# Altium PCB RheoBoard_V8.PcbDoc (part 3 of 3)
Units mm, origin at the board's own origin, x right, y up, seen from the top; angles counter-clockwise.
Board outline 57.53 x 83.82 mm, 2 copper layers (Top Layer, Bottom Layer); 104 components, 45 nets, 269 pads, 428 vias.
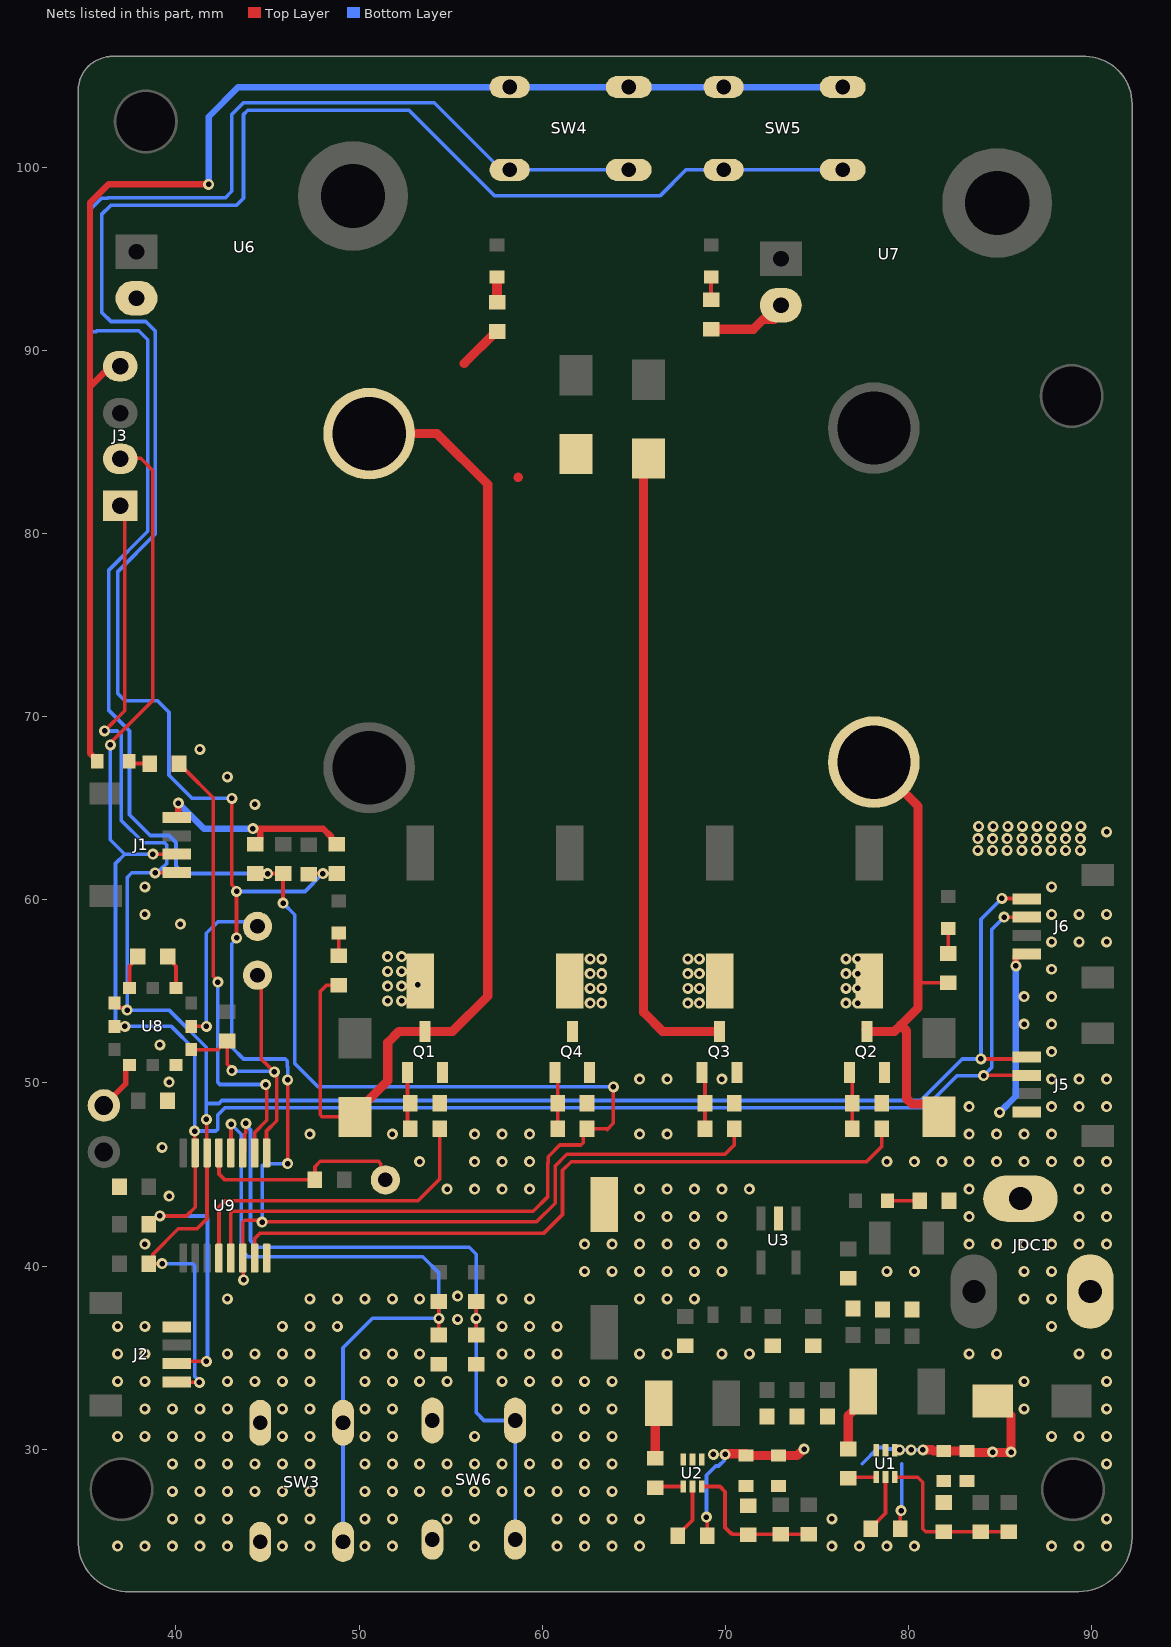
[diagram p2: the nets of this part, all layers, seen from the top]

## Via types
v1: diameter 0.6, hole 0.3, Top Layer to Bottom Layer, tented both sides, 428 vias

## Nets (pads, with @x,y where several pads share a name; then routed paths per layer and width w, separated by ;. In a path a pad name is that pad's centre, name@x,y a point inside that pad or via, vN(x,y) a via of type N, cw(c..) or ccw(c..) an arc to the next point about the centre after c; other vN are vias at no path point) (continued)
GND: C2.1 C3.1 C4.1 C5.1 C6.1 C8.1 C9.1 C10.1 C11.1 C12.1 C13.1 C14.1 C15.2 C16.1 C17.1 C18.1 C19.1 C20.2 C21.2 C22.2 C23.2 C26.1 C29.1 C32.1 C33.1 D6.2 J1.1 J2.1 J3.4 J5.1 J6.1 JDC1.2 JDC1.3 Q1.2 Q2.2 Q3.2 Q4.2 R3.1 R7.1 R8.2 R14.1 R20.1 R23.1 R24.1 SW3.3 SW3.4 SW4.3 SW4.4 SW5.3 SW5.4 SW6.3 SW6.4 U1.3 U2.3 U3.2 U8.10 U9.8 | length 99.7
  Top Layer w0.35: D6.2@35.701,67.564 35.701,67.614 35.526,67.789 35.511,67.789 35.306,67.994 35.306,88.011 ; J3.4@36.957,89.129 36.424,89.129 35.306,88.011 ; J1.1@40.042,64.492 40.132,64.582 v1(40.132,65.278) ; v1(41.783,99.06) 36.322,99.06 35.306,98.044 35.306,88.011 ; v1(44.196,63.881) 44.655,63.881 ; C26.1@44.323,63.03 44.373,63.03 44.598,63.255 44.598,63.824 44.655,63.881 ; C29.1@48.768,63.03 48.718,63.03 48.493,63.255 48.493,63.422 48.034,63.881 44.655,63.881 ; v1(85.852,56.388) 85.85,56.39 85.85,56.922 85.975,57.047 J6.1@86.45,57.047
  Bottom Layer w0.35: v1(40.132,65.278) 41.529,63.881 v1(44.196,63.881) ; v1(41.783,99.06) 41.783,102.743 43.409,104.369 SW4.4@58.217,104.369 SW4.3@64.719,104.369 SW5.4@69.901,104.369 SW5.3@76.403,104.369 ; v1(84.963,48.387) 85.852,49.276 85.852,54.705 v1(85.852,56.388)
  other v1: 36.809,24.705 38.309,24.705 39.809,24.705 41.309,24.705 42.809,24.705 45.809,24.705 47.309,24.705 50.309,24.705 51.809,24.705 56.309,24.705 60.809,24.705 62.309,24.705 63.809,24.705 65.309,24.705 75.809,24.705 77.309,24.705 78.809,24.705 80.309,24.705 87.809,24.705 89.309,24.705 90.809,24.705 39.809,26.205 41.309,26.205 42.809,26.205 45.809,26.205 47.309,26.205 50.309,26.205 51.809,26.205 54.809,26.205 56.309,26.205 60.809,26.205 62.309,26.205 63.809,26.205 65.309,26.205 75.809,26.205 90.809,26.205 39.809,27.705 41.309,27.705 42.809,27.705 44.309,27.705 45.809,27.705 47.309,27.705 50.309,27.705 51.809,27.705 53.309,27.705 54.809,27.705 56.309,27.705 57.809,27.705 59.309,27.705 60.809,27.705 62.309,27.705 63.809,27.705 39.809,29.205 41.309,29.205 42.809,29.205 44.309,29.205 45.809,29.205 47.309,29.205 50.309,29.205 51.809,29.205 53.309,29.205 54.809,29.205 56.309,29.205 57.809,29.205 59.309,29.205 60.809,29.205 62.309,29.205 63.809,29.205 90.809,29.205 36.809,30.705 38.309,30.705 39.809,30.705 41.309,30.705 42.809,30.705 45.809,30.705 47.309,30.705 50.309,30.705 51.809,30.705 56.309,30.705 60.809,30.705 62.309,30.705 63.809,30.705 87.809,30.705 89.309,30.705 90.809,30.705 38.309,32.205 39.809,32.205 41.309,32.205 42.809,32.205 45.809,32.205 47.309,32.205 50.309,32.205 51.809,32.205 60.809,32.205 62.309,32.205 63.809,32.205 86.309,32.205 90.809,32.205 36.809,33.705 38.309,33.705 42.809,33.705 44.309,33.705 45.809,33.705 47.309,33.705 50.309,33.705 51.809,33.705 53.309,33.705 54.809,33.705 57.809,33.705 59.309,33.705 60.809,33.705 62.309,33.705 63.809,33.705 86.309,33.705 90.809,33.705 36.809,35.205 38.309,35.205 42.809,35.205 44.309,35.205 45.809,35.205 47.309,35.205 50.309,35.205 51.809,35.205 53.309,35.205 57.809,35.205 59.309,35.205 60.809,35.205 65.309,35.205 66.809,35.205 69.809,35.205 71.309,35.205 83.309,35.205 84.809,35.205 89.309,35.205 90.809,35.205 36.809,36.705 38.309,36.705 45.809,36.705 47.309,36.705 48.809,36.705 57.809,36.705 59.309,36.705 60.809,36.705 87.809,36.705 55.372,37.084 42.809,38.205 47.309,38.205 48.809,38.205 50.309,38.205 51.809,38.205 53.309,38.205 57.809,38.205 59.309,38.205 65.309,38.205 66.809,38.205 68.309,38.205 86.309,38.205 87.809,38.205 55.372,38.354 62.309,39.705 63.809,39.705 65.309,39.705 66.809,39.705 68.309,39.705 69.809,39.705 78.809,39.705 80.309,39.705 86.309,39.705 87.809,39.705 38.309,41.205 62.309,41.205 63.809,41.205 65.309,41.205 66.809,41.205 68.309,41.205 69.809,41.205 83.309,41.205 84.809,41.205 86.309,41.205 87.809,41.205 89.309,41.205 90.809,41.205 65.309,42.705 66.809,42.705 68.309,42.705 69.809,42.705 83.309,42.705 89.309,42.705 90.809,42.705 39.624,43.815 54.809,44.205 56.309,44.205 57.809,44.205 59.309,44.205 65.309,44.205 66.809,44.205 68.309,44.205 69.809,44.205 71.309,44.205 83.309,44.205 89.309,44.205 90.809,44.205 53.309,45.705 56.309,45.705 57.809,45.705 59.309,45.705 78.809,45.705 80.309,45.705 81.809,45.705 83.309,45.705 84.809,45.705 86.309,45.705 87.809,45.705 89.309,45.705 90.809,45.705 39.243,46.482 47.309,47.205 51.809,47.205 56.309,47.205 57.809,47.205 59.309,47.205 65.309,47.205 66.809,47.205 83.309,47.205 84.809,47.205 86.309,47.205 87.809,47.205 83.309,48.705 87.809,48.705 89.309,48.705 90.809,48.705 39.624,50.038 65.309,50.205 66.809,50.205 69.809,50.205 87.809,50.205 89.309,50.205 90.809,50.205 87.809,51.705 39.116,52.07 86.309,53.205 87.809,53.205 62.611,54.356 63.246,54.356 67.945,54.356 68.58,54.356 76.581,54.356 77.216,54.356 51.562,54.483 52.324,54.483 86.309,54.705 87.809,54.705 62.611,55.16 63.246,55.16 67.945,55.16 68.58,55.16 76.581,55.16 77.216,55.16 51.562,55.287 52.324,55.287 53.213,55.372 62.611,55.965 63.246,55.965 67.945,55.965 68.58,55.965 76.581,55.965 77.216,55.965 51.562,56.092 52.324,56.092 87.809,56.205 62.611,56.769 63.246,56.769 67.945,56.769 68.58,56.769 76.581,56.769 77.216,56.769 51.562,56.896 52.324,56.896 87.809,57.705 89.309,57.705 90.809,57.705 40.244,58.674 38.309,59.205 87.809,59.205 89.309,59.205 90.809,59.205 38.309,60.705 87.809,60.705 83.784,62.697 84.582,62.697 85.38,62.697 86.179,62.697 86.977,62.697 87.775,62.697 88.573,62.697 89.372,62.697 83.784,63.332 84.582,63.332 85.38,63.332 86.179,63.332 86.977,63.332 87.775,63.332 88.573,63.332 89.372,63.332 90.809,63.705 83.82,64.008 84.618,64.008 85.417,64.008 86.215,64.008 87.013,64.008 87.811,64.008 88.61,64.008 89.408,64.008 44.309,65.205 42.809,66.705 41.309,68.205
LED: R6.1 U9.10 | length 25
  Top Layer w0.2: R6.1@40.17,67.437 40.17,67.387 40.47,67.087 40.52,67.087 42.037,65.57 42.037,55.816 42.291,55.562 v1(42.291,55.499) ; U9.10@44.297,46.177 44.297,47.294 44.958,47.955 44.958,49.853 v1(44.901,49.91)
  Bottom Layer w0.2: v1(42.291,55.499) 42.291,50.028 42.408,49.911 v1@44.9,49.911
NetC1_1: C1.1 L1.1 U1.2 | length 3.5
  Top Layer w0.5: C1.1@76.708,30.01 76.708,31.83 77.525,32.647 L1.1@77.525,33.147
NetC1_2: C1.2 U1.4 | length 1.9
  Top Layer w0.2: C1.2@76.462,28.164 C1.2@76.708,28.41 76.773,28.475 U1.4@78.24,28.475
NetC7_1: C7.1 L2.1 U2.2 | length 3.1
  Top Layer w0.5: C7.1@66.167,29.502 66.167,32.33 L2.1@66.349,32.512
NetC7_2: C7.2 U2.4 | length 1.6
  Top Layer w0.2: C7.2@66.167,27.902 66.232,27.967 U2.4@67.699,27.967
NetC24_1: C24.1 R1.1 R7.2 U1.6 | length 9
  Top Layer w0.2: U1.6@79.24,28.475 80.491,28.475 80.772,28.194 80.772,25.654 80.937,25.489 R7.2@81.915,25.489 R1.1@83.947,25.489 C24.1@85.471,25.489
NetC25_1: C25.1 R2.1 R3.2 U2.6 | length 8.1
  Top Layer w0.2: U2.6@68.699,27.967 69.696,27.967 69.977,27.686 69.977,25.728 70.305,25.4 70.358,25.4 70.396,25.362 R2.1@73.025,25.362 C25.1@74.549,25.362
NetC26_2: C26.2 R18.1 R22.1 SW4.1 SW4.2 U9.5 | length 141
  Top Layer w0.2: U9.5@42.997,40.437 42.997,42.88 43.114,42.997 59.507,42.997 60.306,43.796 60.306,45.632 60.325,45.651 60.325,45.974 60.96,46.609 62.103,46.609 62.23,46.736 62.23,47.291 R22.1@62.437,47.498 63.5,47.498 63.544,47.454 63.881,47.791 v1(63.881,49.784) ; v1(45.008,61.43) R18.1@45.847,61.43 v1(45.847,59.817)
  Bottom Layer w0.2: v1(45.008,61.43) 40.424,61.43 40.005,61.849 40.005,63.119 39.617,63.507 38.601,63.507 37.465,64.643 37.465,69.215 36.322,70.358 36.322,77.978 38.462,80.118 38.462,90.57 37.973,91.059 35.687,91.059 35.643,91.015 35.477,91.015 35.306,91.186 35.306,97.663 35.941,98.298 36.264,98.298 36.283,98.317 42.691,98.317 43.053,98.679 43.053,102.87 43.688,103.505 54.102,103.505 57.76,99.847 SW4.2@58.217,99.847 SW4.1@64.719,99.847 ; v1(45.847,59.817) 46.482,59.182 46.482,51.054 47.752,49.784 v1(63.881,49.784)
NetC29_2: C29.2 R19.1 R21.1 SW5.1 SW5.2 U9.6 | length 155
  Top Layer w0.2: v1(43.053,65.532) 43.053,60.814 43.307,60.56 v1(43.307,60.452) v1(43.307,57.912) ; v1(43.688,39.243) 43.667,39.264 43.667,40.417 U9.6@43.647,40.437 43.647,42.387 43.764,42.504 44.387,42.504 44.396,42.495 v1@44.695,42.495 ; v1(44.704,42.397) 44.725,42.418 59.69,42.418 60.706,43.434 60.706,45.466 61.341,46.101 69.977,46.101 70.481,46.605 R21.1@70.481,47.498 ; v1(46.101,45.593) v1(46.101,50.165) ; R19.1@47.244,61.4 47.274,61.43 v1(48.021,61.43)
  Bottom Layer w0.2: v1(43.053,65.532) 40.894,65.532 39.624,66.802 39.624,70.231 38.989,70.866 37.211,70.866 36.83,71.247 36.83,77.92 38.862,79.952 38.862,91.059 38.354,91.567 36.449,91.567 35.941,92.075 35.941,97.409 36.449,97.917 43.307,97.917 43.688,98.298 43.688,102.87 43.923,103.105 52.724,103.105 57.404,98.425 66.421,98.425 67.843,99.847 SW5.2@69.901,99.847 SW5.1@76.403,99.847 ; v1(43.307,57.912) 43.307,57.849 43.053,57.595 43.053,51.943 43.688,51.308 45.965,51.308 46.082,51.191 46.082,50.888 46.101,50.869 v1(46.101,50.165) ; v1(43.307,60.452) 47.043,60.452 v1(48.021,61.43) ; v1(44.704,42.397) 44.704,45.476 44.821,45.593 v1(46.101,45.593)
NetC30_1: C30.1 U8.6 | length 1.9
  Top Layer w0.2: C30.1@39.535,56.896 39.535,56.846 40.005,56.376 U8.6@40.005,55.186
NetC30_2: C30.2 U8.4 | length 1.9
  Top Layer w0.2: U8.4@37.465,55.186 37.465,56.376 37.935,56.846 C30.2@37.935,56.896
NetD1_2: D1.2 R8.1 | length 1.8
  Top Layer w0.2: D1.2@78.855,43.561 R8.1@80.607,43.561
NetD2_1: D2.1 Q1.3 R9.1 U4.2 | length 57.7
  Top Layer w0.2: R9.1@48.895,55.334 48.222,55.334 47.879,54.991 47.879,48.261 47.996,48.144 D2.1@49.784,48.144
  Top Layer w0.5: U4.2@49.53,85.447 54.253,85.447 57.023,82.677 57.023,54.737 55.1,52.814 Q1.3@53.594,52.814 52.179,52.814 51.562,52.197 51.562,50.122 49.784,48.344 D2.1@49.784,48.144
NetD3_1: D3.1 Q2.3 R12.1 U5.2 | length 25.9
  Top Layer w0.2: 80.518,55.372 80.607,55.461 R12.1@82.169,55.461
  Top Layer w0.5: Q2.3@77.674,52.959 77.674,52.914 77.774,52.814 79.23,52.814 79.566,53.149 ; U5.2@78.105,67.512 80.518,65.099 80.518,55.372 80.518,54.102 79.566,53.149 ; D3.1@81.661,48.155 81.661,48.206 81.011,48.856 80.176,48.856 79.883,49.149 79.883,52.832 79.566,53.149
NetD4_1: D4.1 Q4.3 R15.1 U6.2 | length 2.5
  Top Layer w0.5: 55.741,89.281 57.481,91.021 R15.1@57.531,91.021 ; 58.674,83.058 58.685,83.069
NetD5_1: D5.1 Q3.3 R16.1 U7.2 | length 37.5
  Top Layer w0.5: D5.1@65.532,83.069 65.532,53.848 66.566,52.814 Q3.3@69.681,52.814 ; R16.1@69.215,91.148 71.527,91.148 72.073,91.694 U7.2@72.644,91.694
NetD6_1: D6.1 R6.2 | length 1.2
  Top Layer w0.2: D6.1@37.451,67.564 37.578,67.437 R6.2@38.57,67.437
NetD7_2: D7.2 R9.2 | length 1.2
  Top Layer w0.2: R9.2@48.895,56.934 D7.2@48.895,58.18
NetD8_2: D8.2 R12.2 | length 1.4
  Top Layer w0.2: R12.2@82.169,57.061 D8.2@82.169,58.434
NetD9_2: D9.2 R15.2 | length 1.4
  Top Layer w0.53: R15.2@57.531,92.621 D9.2@57.531,93.994
NetD10_2: D10.2 R16.2 | length 1.2
  Top Layer w0.2: R16.2@69.215,92.748 D10.2@69.215,93.994
NetJP1_1: JP1.1 U8.12 | length 2.8
  Top Layer w0.3: JP1.1@36.068,48.768 37.266,49.966 37.266,50.811 37.441,50.986 U8.12@37.465,50.986
NetQ1_1: Q1.1 R10.2 R14.2 | length 3.1
  Top Layer w0.2: Q1.1@52.644,50.564 52.644,47.648 R10.2@52.794,47.498
NetQ2_1: Q2.1 R11.2 R20.2 | length 3.1
  Top Layer w0.2: Q2.1@76.774,50.564 76.924,50.414 R20.2@76.924,48.895 R11.2@76.924,47.498
NetQ3_1: Q3.1 R21.2 R23.2 | length 3.1
  Top Layer w0.2: Q3.1@68.731,50.564 68.881,50.414 R23.2@68.881,48.895 R21.2@68.881,47.498
NetQ4_1: Q4.1 R22.2 R24.2 | length 3.1
  Top Layer w0.2: Q4.1@60.687,50.564 60.837,50.414 R24.2@60.837,48.895 R22.2@60.837,47.498
NetR10_1: R10.1 U9.4 | length 18.2
  Top Layer w0.2: U9.4@42.347,40.437 42.347,43.236 42.672,43.561 53.213,43.561 54.394,44.742 R10.1@54.394,47.498
NetR11_1: R11.1 U9.7 | length 39.8
  Top Layer w0.2: U9.7@44.297,40.437 44.297,41.503 44.577,41.783 60.071,41.783 61.106,42.818 61.106,45.231 61.576,45.701 77.705,45.701 78.524,46.52 R11.1@78.524,47.498
NetR13_2: R13.2 TP1.1 U9.13 | length 12
  Top Layer w0.2: U9.13@42.347,46.177 42.347,45.029 42.672,44.704 R13.2@47.587,44.704 47.587,45.428 47.879,45.72 51.054,45.72 51.181,45.593 51.181,44.958 TP1.1@51.435,44.704
NetR25_1: R25.1 U1.5 | length 3.2
  Top Layer w0.2: R25.1@77.94,25.654 77.94,25.704 78.74,26.504 U1.5@78.74,28.475
NetR26_1: R26.1 U2.5 | length 3
  Top Layer w0.2: R26.1@67.399,25.273 67.399,25.323 68.199,26.123 U2.5@68.199,27.967
NetTP3_1: TP3.1 U8.8 | length 9.1
  Top Layer w0.2: U8.8@40.835,53.086 v1(41.656,53.086)
  Bottom Layer w0.2: v1(41.656,53.086) 41.656,58.166 42.291,58.801 44.196,58.801 TP3.1@44.45,58.547
RES: R17.2 TP2.1 U8.9 U9.9 | length 16.6
  Top Layer w0.2: U8.9@40.835,51.816 42.279,51.816 42.749,52.286 R17.2@42.799,52.286 42.799,51.035 43.053,50.781 v1(43.053,50.673) ; TP2.1@44.45,55.88 44.649,55.681 44.649,51.318 v1(45.37,50.597) 45.37,50.489 45.501,50.357 45.501,47.932 44.947,47.378 U9.9@44.947,46.177
  Bottom Layer w0.2: v1(43.053,50.673) 43.091,50.635 45.332,50.635 v1(45.37,50.597)
SCL: J1.4 J2.4 J3.1 J5.4 J6.4 R28.2 U8.3 U9.14 | length 120
  Top Layer w0.2: v1(36.103,69.215) 37.211,70.323 37.211,81.255 J3.1@36.957,81.509 ; U8.3@36.635,54.356 36.635,54.331 36.86,54.106 37.207,54.106 v1(37.338,53.975) ; v1(38.862,61.468) 40.018,61.468 J1.4@40.042,61.492 ; v1(39.243,40.132) R28.2@38.519,40.132 38.744,40.357 38.744,40.649 40.132,42.037 41.148,42.037 41.697,42.586 U9.14@41.697,46.177 41.677,46.197 41.677,47.985 v1(41.656,48.006) ; J2.4@40.042,33.679 40.066,33.655 v1(41.275,33.655) ; v1(83.947,51.308) 86.347,51.308 J5.4@86.45,51.411 ; v1(85.09,60.071) 86.426,60.071 J6.4@86.45,60.047
  Bottom Layer w0.2: v1(36.103,69.215) 36.79,69.215 37.015,68.99 37.015,64.33 38.237,63.107 39.38,63.107 39.497,62.99 39.497,61.976 39.279,61.758 39.26,61.758 38.97,61.468 37.592,61.468 37.338,61.214 v1(37.338,53.975) 39.624,53.975 41.656,51.943 41.656,48.879 ; v1(39.243,40.132) 40.904,40.132 41.021,40.015 41.021,33.972 41.275,33.718 v1(41.275,33.655) ; v1(41.656,48.006) 41.656,48.879 ; v1(85.09,60.071) 83.947,58.928 v1(83.947,51.308) 82.931,51.308 80.664,49.041 42.506,49.041 42.344,48.879 41.656,48.879
SDA: J1.3 J2.3 J3.2 J5.3 J6.3 R27.2 U8.2 U9.15 | length 121.8
  Top Layer w0.2: v1(36.415,68.453) 36.415,68.561 38.735,70.881 38.735,83.439 38.075,84.099 J3.2@36.957,84.099 ; v1(38.735,62.484) 40.034,62.484 J1.3@40.042,62.492 ; v1(39.116,42.735) 40.576,42.735 41.047,43.206 U9.15@41.047,46.177 41.034,46.19 41.034,47.358 v1(41.021,47.371) ; J2.3@40.234,34.671 40.361,34.798 v1(41.656,34.798) ; v1(84.095,50.399) v1(84.095,50.399) 84.082,50.411 J5.3@86.45,50.411 ; v1(85.217,59.055) 85.225,59.047 J6.3@86.45,59.047
  Bottom Layer w0.2: v1(36.415,68.453) 36.415,63.28 37.211,62.484 ; v1(38.735,62.484) 37.211,62.484 ; v1(39.116,42.735) 41.602,42.735 41.719,42.618 41.719,34.861 v1(41.656,34.798) ; v1(85.217,59.055) 84.547,58.385 84.547,50.851 v1(84.095,50.399) 82.657,50.399 80.899,48.641 42.672,48.641 42.291,48.26 42.291,47.488 42.174,47.371 v1(41.021,47.371) 41.021,51.816 39.751,53.086 v1(37.211,53.086) 36.83,53.086 36.703,53.213 36.703,61.976 37.211,62.484
SW1: C9.2 R4.1 SW3.1 SW3.2 U9.12 | length 40.8
  Top Layer w0.2: U9.12@42.997,46.177 43.007,46.187 43.007,47.737 v1(43.016,47.747) ; C9.2@54.356,36.233 v1(54.356,37.148) R4.1@54.356,38.062
  Bottom Layer w0.2: v1(43.016,47.747) 43.016,47.737 43.561,47.192 43.561,40.884 43.932,40.513 53.467,40.513 54.356,39.624 v1(54.356,37.148) 50.736,37.148 49.124,35.535 SW3.1@49.124,31.445 SW3.2@49.124,24.943
SW2: C10.2 R5.1 SW6.1 SW6.2 U9.11 | length 40.1
  Top Layer w0.2: U9.11@43.647,46.177 43.752,46.282 43.752,47.216 43.815,47.279 v1(43.815,47.787) ; C10.2@56.388,36.233 v1(56.388,37.148) R5.1@56.388,38.062
  Bottom Layer w0.2: v1(43.815,47.787) 43.815,47.679 44.069,47.425 44.069,41.402 44.45,41.021 56.007,41.021 56.388,40.64 v1(56.388,37.148) 56.388,32.004 56.82,31.572 SW6.1@58.522,31.572 SW6.2@58.522,25.07
VIN: C2.2 C3.2 C4.2 C8.2 D11.2 R25.2 R26.2 U1.1 U2.1 | length 29
  Top Layer w0.2: v1(68.961,26.289) 68.999,26.251 R26.2@68.999,25.273 ; R25.2@79.54,25.654 79.54,26.632 79.502,26.67 79.568,26.67 v1(79.584,26.653)
  Top Layer w0.5: v1(69.977,29.718) 70.004,29.718 70.042,29.756 C8.2@71.12,29.756 ; C8.2@71.12,29.657 72.699,29.657 72.748,29.706 C4.2@72.898,29.706 ; C4.2@72.898,29.657 73.915,29.657 74.268,30.01 v1(74.295,30.01) ; v1@80.799,29.972 81.28,29.972 81.349,29.903 81.641,29.903 81.655,29.917 81.671,29.9 82.931,29.9 83.006,29.826 v1@84.563,29.826 ; v1(84.582,29.845) v1@84.563,29.826 ; D11.2@84.593,32.639 84.793,32.639 85.598,31.834 v1(85.598,29.845) 85.579,29.826 v1@84.563,29.826
  Bottom Layer w0.2: v1(68.961,26.289) 68.961,28.575 69.469,29.083 69.622,29.083 69.942,29.403 69.942,29.683 v1(69.977,29.718) ; 77.47,29.21 78.359,30.099 78.813,30.099 78.902,30.01 79.464,30.01 79.506,29.968 79.51,29.972 v1(80.137,29.972) v1(80.772,29.972) 80.835,29.909 84.519,29.909 v1(84.582,29.845) ; v1(79.584,26.653) 79.629,26.698 79.629,29.21
  other v1: 69.342,29.718 79.502,29.972
pads on no net: J1.S1 J1.S2 J2.S1 J2.S2 J5.S1 J5.S2 J6.S1 J6.S2 MH1.1 MH2.1 MH3.1 MH4.1 U3.4 U6.3 U7.3 U8.1 U8.5 U8.7 U8.11

## Polygon pours and split planes (outlines as drawn)
GND on Bottom Layer "GND_L02_P000" (solid, remove dead copper, pour order 0): 90.297,0.254 91.567,1.524 91.567,57.404 46.101,57.404 45.339,58.166 45.339,66.04 42.164,69.215 30.988,69.215 30.988,1.524 32.131,0.381 33.528,0.381
6V on Bottom Layer "6V_L02_P048" (solid, pour order 48): 70.104,93.345 70.739,93.98 75.311,93.98 75.311,96.266 75.057,96.52 68.199,96.52 67.691,96.012 67.691,93.726
6V on Bottom Layer "6V_L02_P046" (solid, pour order 46): 42.037,91.821 41.783,92.075 41.783,94.107 41.656,94.234 36.703,94.234 36.49,94.447 36.49,96.942 36.576,97.028 42.926,97.028 43.307,96.647 43.307,94.742 43.688,94.361 45.72,94.361 45.72,91.948 45.593,91.821
6V on Bottom Layer "6V_L02_P045" (solid, pour order 45): 67.691,91.313 67.691,64.643 67.945,64.389 68.072,64.516 70.104,64.516 70.104,93.853 69.469,94.488 67.691,94.488
6V on Bottom Layer "6V_L02_P044" (solid, pour order 44): 61.468,60.579 57.15,60.579 56.515,61.214 56.515,91.186 55.88,91.821 45.212,91.821 44.958,92.075 44.958,93.98 45.339,94.361 57.531,94.361 58.42,93.472 58.42,65.405 58.928,64.897 61.468,64.897
4V5 on Bottom Layer "4V5_L02_P041" (solid, pour order 41): 74.676,61.849 74.676,60.071 74.422,59.817 55.372,59.817 54.864,60.325 54.864,69.596 54.102,70.358 46.736,70.358 46.228,69.85 46.228,65.024 46.609,64.643 50.165,64.643 50.546,64.262 50.546,59.055 51.562,58.039 77.089,58.039 79.629,60.579 79.629,61.436
4V5 on Bottom Layer "4V5_L02_P040" (solid, pour order 40): 74.676,61.849 74.676,61.214 74.93,60.96 81.534,60.96 82.526,61.952 82.526,64.238 84.709,66.421 84.709,86.995 83.185,88.519 75.311,88.519 75.057,88.265 75.057,83.312 75.565,82.804 81.28,82.804 82.423,81.661 82.423,66.167 80.899,64.643 74.986,64.643 74.709,64.365
GND on Bottom Layer "GND_L02_P035" (solid, pour order 35): 82.169,57.15 82.169,63.627 83.312,64.77 90.424,64.77 91.313,63.881 91.313,57.023
4V5 on Bottom Layer "4V5_L02_P032" (solid, pour order 32): 51.435,65.405 50.927,64.897 50.927,59.055 81.915,59.055 81.915,64.008 74.93,64.008 74.93,59.309 58.42,59.309 57.912,59.817 57.912,64.643 57.15,65.405 55.118,65.405
GND on Top Layer "GND_L01_P001" (solid, remove dead copper, pour order 1): 90.28,0.253 92.203,2.176 92.203,51.562 47.625,51.562 45.212,53.975 45.212,66.04 41.91,69.342 30.971,69.342 30.971,1.523 32.114,0.38 33.511,0.38
NetD5_1 on Top Layer "NETD5_1_L01_P050" (solid, pour order 50): 65.151,84.446 71.628,84.328 71.628,92.71 72.517,93.599 74.549,93.599 74.549,82.677 73.279,81.407 65.151,81.407
6V on Top Layer "6V_L01_P053" (solid, pour order 53): 70.866,31.242 70.866,32.893 75.311,32.893 75.946,32.893 75.946,33.655 75.143,34.417 71.737,34.417 71.102,33.782 69.215,33.782 69.215,31.242
GND on Top Layer "GND_L01_P036" (solid, pour order 36): 82.677,50.8 83.058,51.181 83.058,64.008 83.566,64.516 90.678,64.516 91.186,64.008 91.186,51.193
NetD4_1 on Top Layer "NETD4_1_L01_P055" (solid, pour order 55): 62.865,85.471 58.547,85.471 58.547,83.312 58.674,83.058 62.865,83.058
NetD4_1 on Top Layer "NETD4_1_L01_P047" (solid, pour order 47): 44.577,90.297 42.291,90.297 41.402,91.186 41.021,91.567 36.449,91.567 36.195,91.821 36.195,93.853 36.449,94.107 43.307,94.107 44.577,92.837
NetD5_1 on Top Layer "NETD5_1_L01_P042" (solid, pour order 42): 69.977,53.467 69.977,51.943 69.723,51.689 65.151,51.689 64.516,52.324 64.516,84.328 64.516,85.344 67.056,85.344 67.056,84.201 67.056,53.908 67.358,53.606 69.838,53.606
NetD3_1 on Top Layer "NETD3_1_L01_P039" (solid, pour order 39): 77.343,53.34 78.994,53.34 79.883,54.229 79.883,64.135 79.502,64.516 75.438,64.516 74.676,65.278 74.676,70.358 75.057,70.739 81.026,70.739 81.661,70.104 81.661,64.262 81.153,63.754 81.153,54.356 80.391,53.594 80.391,52.881 79.619,52.109 77.431,52.109 77.343,52.197
NetD4_1 on Top Layer "NETD4_1_L01_P038" (solid, pour order 38): 61.722,52.324 61.595,52.197 58.293,52.197 57.658,52.832 57.658,86.614 53.975,90.297 44.069,90.297 44.069,92.837 55.665,92.837 59.436,89.066 59.436,53.975 59.944,53.467 61.976,53.467 61.976,52.269 61.927,52.22
NetD2_1 on Top Layer "NETD2_1_L01_P037" (solid, pour order 37): 53.594,52.814 53.34,52.56 53.34,52.197 53.594,51.943 56.007,51.943 57.277,53.213 57.277,85.725 54.737,88.265 44.577,88.265 44.196,87.884 44.196,82.931 44.577,82.55 55.372,82.55 55.626,82.296 55.626,54.229 54.737,53.34 53.721,53.34

## Keep-outs
Keep-Out Layer:
  circle w0.254: c50.057,76.694 r4
  circle w0.254: c77.978,76.758 r4
  lines w0.254: 34.798,25.146 34.798,104.394 ; 34.798,25.273 34.798,24.848 ccw(c37.38,24.934) 37.465,22.352 89.281,22.352 ccw(c89.218,25.209) 92.075,25.273 92.075,103.378 ccw(c89.599,103.442) 89.662,105.918 36.396,105.918 ; 34.798,104.184 cw(c36.532,104.184) 35.306,105.41 cw(c36.523,104.193) 36.523,105.914

## Other copper
Top Layer:
  pour cut-out: 71.218,32.777 74.959,32.777 74.959,32.604 71.355,32.604 71.218,32.466
  region net VIN: 68.58,29.083 71.374,29.21 71.501,29.337 71.501,30.099 68.58,29.972
  region net 4V5A: 73.66,42.037 76.327,42.037 76.581,41.783 76.708,41.91 76.708,43.561 73.914,43.561 73.66,43.307
  region net 3V3: 73.406,40.894 73.279,40.767 73.279,38.989 73.152,38.862 70.739,38.862 70.612,38.735 70.612,36.83 70.739,36.703 75.057,36.703 75.311,36.957 75.311,40.64 75.057,40.894
  region net VIN: 79.121,29.718 79.248,29.591 81.534,29.591 81.661,29.718 81.661,30.353 79.248,30.353 79.121,30.226
  region net NetC1_1: 78.613,29.718 78.613,30.607 78.105,31.115 76.835,31.115 76.835,32.004 78.359,32.004 78.867,31.496 78.867,30.099
  region net NetC7_1: 68.072,29.21 68.072,30.226 67.564,30.734 65.659,30.734 65.659,31.496 65.786,31.369 68.072,31.369 68.326,31.115 68.326,29.664
  region net 4V5: 74.422,46.355 75.819,46.355 75.946,46.482 75.946,60.579 76.073,60.706 78.74,60.706 78.994,60.96 78.994,64.008 78.74,64.262 75.565,64.262 74.295,62.992 74.295,46.482
  region net GND: 78.867,53.975 76.327,53.975 76.2,54.102 76.2,57.023 76.327,57.15 78.74,57.15 78.867,57.023 78.867,56.896
  region net GND: 70.485,53.975 67.691,53.975 67.564,54.102 67.564,57.023 67.691,57.15 70.358,57.15 70.485,57.023 70.485,56.896
  region net GND: 63.627,53.975 60.833,53.975 60.706,54.102 60.706,57.023 60.833,57.15 63.5,57.15 63.627,57.023 63.627,56.896
  region net GND: 54.102,54.102 51.308,54.102 51.181,54.229 51.181,57.15 51.308,57.277 53.975,57.277 54.102,57.15 54.102,57.023
  region net 4V5: 80.01,35.687 75.946,35.687 75.692,35.941 75.692,36.576 75.819,36.703 80.518,36.703 80.653,36.568 80.653,36.097
  pour cut-out: 65.63,34.689 65.63,30.244 71.218,30.244 71.218,34.689
  region net 6V: 71.755,61.214 72.39,60.579 72.39,46.482 72.517,46.355 73.914,46.355 74.041,46.482 74.041,63.373 73.406,64.008 72.771,64.008 72.263,63.5
  region net 6V: 69.977,61.087 72.898,61.087 73.152,61.341 73.152,63.754 72.898,64.008 70.231,64.008
  region net 6V: 60.833,60.706 61.087,60.452 63.5,60.452 63.754,60.706 63.754,65.151 63.5,65.405 60.96,65.405 60.833,65.278 60.833,63.373
  pour cut-out: 76.581,35.433 76.581,30.988 82.169,30.988 82.169,35.433
Bottom Layer:
  region net VIN: 84.709,30.48 78.232,30.48 77.47,29.718 73.787,29.718 73.279,30.226 69.342,30.226 69.215,30.099 69.215,28.956 69.342,28.829 84.836,28.829 84.963,28.956 84.963,30.226
  region net 4V5: 74.422,47.498 74.295,47.371 74.295,36.449 75.057,35.687 79.629,35.687 79.883,35.941 79.883,37.084 79.756,37.211 76.327,37.211 76.2,37.338 76.2,47.371 76.073,47.498
  region net 6V: 72.517,47.498 72.39,47.371 72.39,33.274 72.644,33.02 75.057,33.02 75.184,33.147 75.184,34.417 74.041,35.56 74.041,47.244 73.787,47.498
  region net 6V: 60.91,60.452 74.041,60.452 74.041,65.024 60.91,65.024

## Silkscreen, mask and mechanical layers (free items; w line width, h text height)
Top Overlay:
  text "GND" at 36.957,88.138 h1
  text "3V3" at 36.957,85.979 h1
  text "SDA" at 36.957,83.947 h1
  text "SCL" at 33.909,78.994 h1

## Text inside footprints (layer, text, board x,y; h text height)
SW3: Top Assembly "1" at 48.515,32.515 h0.6 r270; Top Assembly "2" at 48.389,24.633 h0.6 r270; Top Assembly "3" at 44.067,32.77 h0.6 r270; Top Assembly "4" at 44.066,24.635 h0.6 r270
SW4: Top Assembly "1" at 65.789,100.456 h0.6 r180; Top Assembly "2" at 57.907,100.582 h0.6 r180; Top Assembly "3" at 66.044,104.904 h0.6 r180; Top Assembly "4" at 57.909,104.905 h0.6 r180
SW5: Top Assembly "4" at 69.593,104.905 h0.6 r180; Top Assembly "3" at 77.728,104.904 h0.6 r180; Top Assembly "2" at 69.591,100.582 h0.6 r180; Top Assembly "1" at 77.473,100.456 h0.6 r180
SW6: Top Assembly "4" at 53.464,24.762 h0.6 r270; Top Assembly "3" at 53.465,32.897 h0.6 r270; Top Assembly "2" at 57.787,24.76 h0.6 r270; Top Assembly "1" at 57.913,32.642 h0.6 r270